# EAGLE board LB_BIT_iX_1IN_1OUT-SMALL-v03(1_1x) (EAGLE 6.5.0)
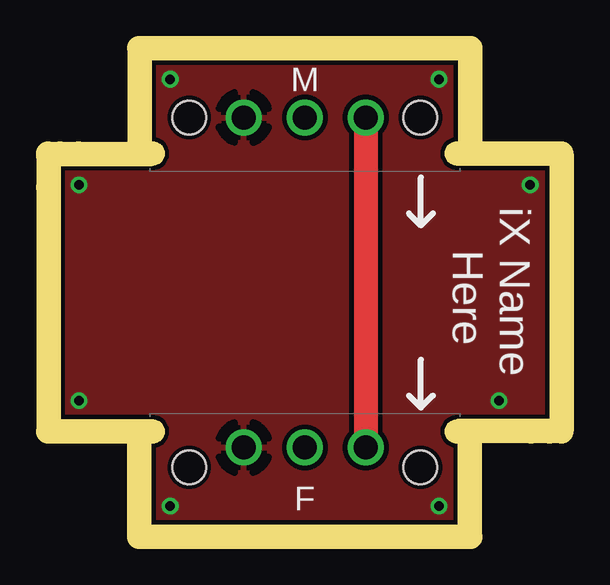
[diagram p0: board, top side]
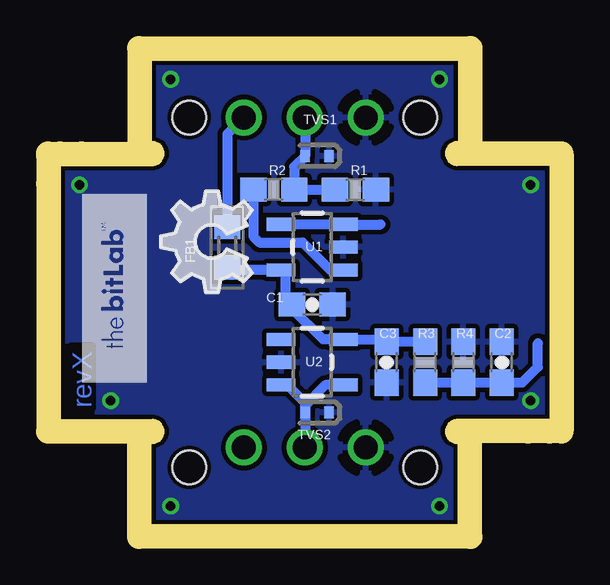
[diagram p1: board, bottom side, seen from below]

Size 20.4 x 19.39 mm. Coordinates in mm from the lower left corner, seen from the top.
Outline: 0,14.99 0,4.4
Outline: 20.4,14.99 20.4,4.4
Copper layers (1*16): Top 0.035mm / dielectric 1.5mm / Bottom 0.035mm
Design rules "default": minimum track width 0.2mm, minimum drill 0.4mm, track to track 0.2mm, track to pad 0.2mm, pad to pad 0.2mm, via to via 0.2mm, smd to smd 0mil, copper to edge 0.2mm, drill to drill 0.2mm, minimum pad ring 0.2mm, minimum via ring 0.15mm, stop-mask expansion 0.1mm, vias tented up to drill 0mil, thermal gap 0.2mm
Milling: 8 lines

## Footprints (pad centres in the part's own frame; a part is rotated, then mirrored left to right if it is on the bottom)
BITSNAP_V03_FEMALE = drill 1: GND 4.065,3.44; SIG 6.605,3.44; VCC 9.145,3.44 | hole 1.4: 1.785,2.61; 11.425,2.61
BITSNAP_V03_MALE = drill 1: GND1 9.145,2.61; SIG1 6.605,2.61; VCC1 4.065,2.61 | hole 1.4: 1.785,2.61; 11.425,2.61
CAP-0603 = smd 1.1 x 1: 1 -0.85,0; 2 0.85,0
R0603 = smd 1 x 1.1: 1 -0.85,0; 2 0.85,0
RES-0603 = smd 1.1 x 1: 1 -0.85,0; 2 0.85,0
SOD-923 = smd 0.4 x 0.5: 1 -0.5,0; 2 0.5,0
SOT23-5 = smd 0.55 x 1.2: 1 -0.95,-1.3; 2 0,-1.3; 3 0.95,-1.3; 4 0.95,1.3; 5 -0.95,1.3

## Placement (x,y rotation side)
BSF1  BITSNAP_V03_FEMALE  [BITSNAP_V03_FEMALE]  3.6,-0.21 0 top
BSM1  BITSNAP_V03_MALE  [BITSNAP_V03_MALE]  16.8,19.61 180 top
C1  0.1uF  [CAP-0603]  9.89,9.19 0 bottom
C2  10uF  [CAP-0603]  1.99,6.79 90 bottom
C3  1.0uF  [CAP-0603]  6.79,6.79 90 bottom
FB1  FERRITE-BEAD0603  [R0603]  13.43,11.58 90 bottom
R1  1meg  [RES-0603]  8.09,13.99 180 bottom
R2  10K  [RES-0603]  11.49,13.99 0 bottom
R3  3K3  [RES-0603]  5.19,6.79 90 bottom
R4  3K3  [RES-0603]  3.59,6.79 270 bottom
TVS1  ESD9B5.0ST5G  [SOD-923]  9.69,15.39 180 bottom
TVS2  ESD9B5.0ST5G  [SOD-923]  9.69,4.69 180 bottom
U1  LV321SOT23-5  [SOT23-5]  9.89,11.59 90 bottom
U2  LV321SOT23-5  [SOT23-5]  9.89,6.79 270 bottom
U$1  OSHW-LOGOL  [OSHW-LOGO-L]  -40.52,-68.43 0 top  (outside the outline)
U$2  OSHWCREDIT  [OSHWCREDIT]  -95.25,-64.52 0 top  (outside the outline)
U$3  FRAME-LETTER  [FABDWG01-OHW]  -3.01,-0.21 0 top  (outside the outline)
U$4  [OSHW_FILLX150_NOTEXT]  12.39,9.69 90 bottom
U$5  [BITLAB-LOGO]  16.79,13.79 270 top

## Library data of the parts
BSF1 BSM1 = bitSnap
C1-C3 FB1 R1-R4 U1 U2 U$2 U$3 U$5 = LITTLEBITS
TVS1 TVS2 = LITTLEBITS; IEC_ESD_PROT0: +/-18kV; LB_PN: ?; MPN: ESD9B5.0ST5G; V_CLAMP: ?; V_OPERATION: 5V
U$1 = LITTLEBITS131206
U$4 = ohw-logo

## Nets
GND: BSF1.GND BSM1.GND1 C1.2 C2.2 C3.1 R1.1 R4.1 TVS1.1 TVS2.1 U1.2 U2.2
LB_VCC: BSF1.VCC BSM1.VCC1 FB1.2
N$2: U1.3 U1.4
N$3: U2.1
N$4: R2.1 U1.1
SIG_IN: BSM1.SIG1 R1.2 R2.2 TVS1.2
SIG_OUT: BSF1.SIG TVS2.2 U2.3 U2.4
VCC: C1.1 C3.2 FB1.1 R3.2 U1.5 U2.5
VREF: C2.1 R3.1 R4.2

## Tracks (layer width: path | path; a pad name or v marks a point on that pad's centre or on a via)
GND  (via drill 0.4)
  other vias: 4.59,0.79 15.79,0.79 18.29,5.19 19.59,14.19 15.79,18.59 4.59,18.59 0.79,14.19 0.79,5.19
  pour Bottom: 0.02,-0.12 20.41,-0.12 20.41,19.38 0.02,19.38
  pour Top: 0.02,-0.12 20.41,-0.12 20.41,19.38 0.02,19.38
LB_VCC
  Top 1: BSM1.VCC1 BSF1.VCC
  Bottom 0.406: BSM1.VCC1 13.43,16.3 FB1.2
N$2
  Bottom 0.406: U1.4 U1.3 7.04,12.54
N$4
  Bottom 0.406: R2.1 12.34,12.04 12.09,11.79 10.29,11.79 9.14,10.64 U1.1
SIG_IN
  Bottom 0.406: R1.2 R2.2 10.64,14.94 TVS1.2 10.19,16.98 BSM1.SIG1
SIG_OUT
  Bottom 0.406: U2.4 9.34,5.84 10.19,4.99 TVS2.2 | U2.3 10.94,5.84 10.19,5.09 TVS2.2 | TVS2.2 BSF1.SIG
VCC
  Bottom 0.406: U1.5 13.43,10.64 FB1.1 | R3.2 C3.2 6.99,7.74 U2.5 9.44,7.74 10.74,9.04 C1.1 10.99,9.19 10.99,10.64 U1.5 | U1.5 11.14,10.59
VREF
  Bottom 0.406: R3.1 R4.2 C2.1 1.14,5.94 0.49,6.59 0.49,7.59

## Text on the board
Bottom: revX
tPlace: iX Name / Here